# EAGLE board VM_Motor_v2.x (EAGLE 7.0.0)
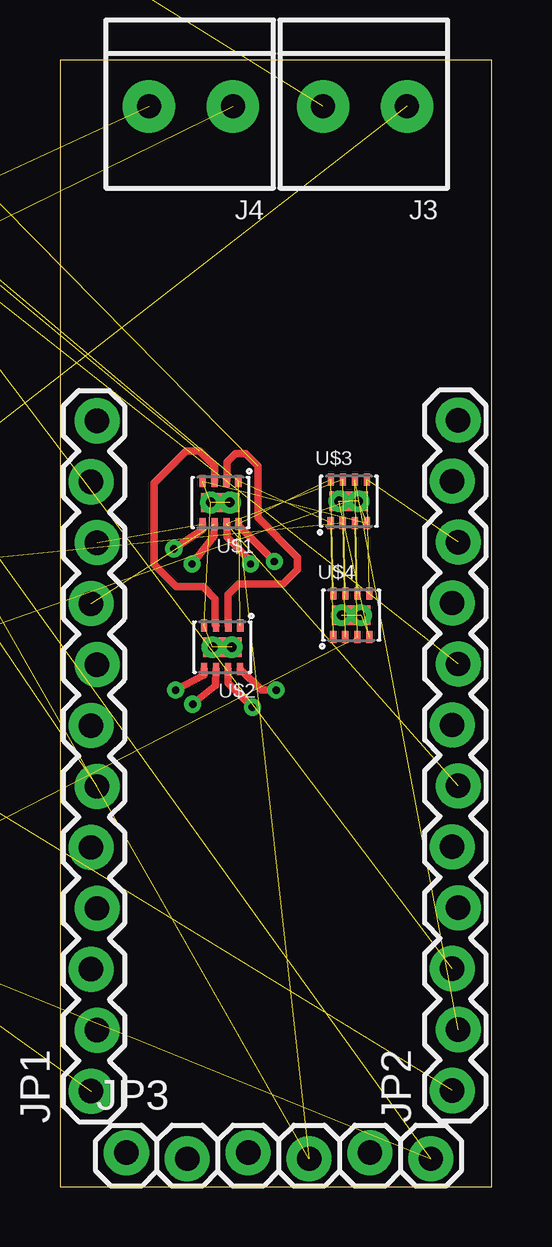
[diagram p0: board, top side]
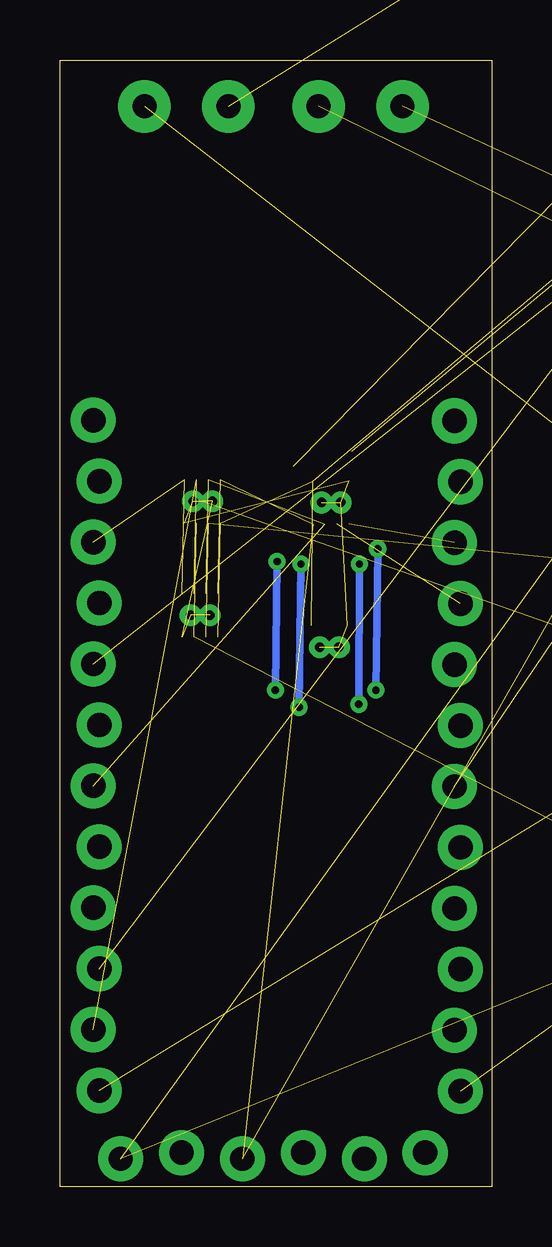
[diagram p1: board, bottom side, seen from below]

Size 18 x 46.97 mm. Coordinates in mm from the lower left corner, seen from the top.
Outline: 0,0 18,0 18,46.97 0,46.97 0,0
Copper layers (1*16): Top 0.035mm / dielectric 1.5mm / Bottom 0.035mm
Design rules "default": minimum track width 10mil, minimum drill 24mil, track to track 8mil, track to pad 8mil, pad to pad 8mil, via to via 8mil, smd to smd 8mil, copper to edge 40mil, drill to drill 8mil, minimum pad ring 10mil, minimum via ring 8mil, stop-mask expansion 4mil, vias tented up to drill 0mil, thermal gap 10mil

## Footprints (pad centres in the part's own frame; a part is rotated, then mirrored left to right if it is on the bottom)
0402-CAP = smd 0.7 x 0.9: 1 -0.65,0; 2 0.65,0
C0402 = smd 0.7 x 0.9: 1 -0.65,0; 2 0.65,0
150CLZ-0810 = smd 3.5 x 2.5: + 3.25,0; - -3.25,0
PTC-1206 = smd 1 x 1.8: 1 -1.4,0; 2 1.4,0
TERMBLOCK_1X2-3.5MM = drill 1 pad 2.184: 1 1.8,0; 2 -1.7,0
1X12_LOCK = drill 1.016 pad 1.88: 1 0,0.127; 2 2.54,-0.127; 3 5.08,0.127; 4 7.62,-0.127; 5 10.16,0.127; 6 12.7,-0.127; 7 15.24,0.127; 8 17.78,-0.127; 9 20.32,0.127; 10 22.86,-0.127; 11 25.4,0.127; 12 27.94,-0.127
1X06_LOCK = drill 1.016 pad 1.88: 1 0,0; 2 2.54,-0.254; 3 5.08,0; 4 7.62,-0.254; 5 10.16,0; 6 12.7,-0.254
1X03_LOCK = drill 1.016 pad 1.88: 1 0,0.127; 2 2.54,-0.127; 3 5.08,0.127
LED-TRICOLOR-5050 = smd 2 x 1.1: 1 -2.4,1.7; 2 -2.4,0; 3 -2.4,-1.7; 4 2.4,-1.7; 5 2.4,0; 6 2.4,1.7
SOT23-3 = smd 0.8 x 0.9: 1 -0.95,-1; 2 0.95,-1; 3 0,1.1
SJ_2S-NO = smd 0.635 x 1.27: 1 -0.45,0; 2 0.45,0
4X0402ARV341 = smd 0.4 x 0.5: 1 -0.8,-0.5; 4 0.8,-0.5; 5 0.8,0.5; 8 -0.8,0.5 | smd 0.3 x 0.5: 2 -0.25,-0.5; 3 0.25,-0.5; 6 0.25,0.5; 7 -0.25,0.5
QFN8 = smd 0.28 x 0.5: P$1 -0.75,-0.9; P$2 -0.25,-0.9 | smd 0.25 x 0.5: P$3 0.25,-0.9; P$4 0.75,-0.9; P$5 0.75,0.9; P$6 0.25,0.9; P$7 -0.25,0.9; P$8 -0.75,0.9 | smd 1.6 x 0.8: P$9 0,0 | drill 0.4 pad 0.6: P$10 0.4,0; P$11 -0.4,0

## Placement (x,y rotation side)
C1  .1uF  [0402-CAP]  -39.37,62.23 0 top  (outside the outline)
C2  .1uF  [0402-CAP]  -43.18,62.23 0 top  (outside the outline)
C3  100nF  [C0402]  -27.94,52.07 0 top  (outside the outline)
C4  100nF  [C0402]  -35.56,52.07 0 top  (outside the outline)
C5  100nF  [C0402]  -43.18,52.07 0 top  (outside the outline)
C6  100nF  [C0402]  -50.8,52.07 0 top  (outside the outline)
C7  1000uF  [150CLZ-0810]  -19.05,16.51 0 top  (outside the outline)
C8  .1uF  [0402-CAP]  -46.99,62.23 0 top  (outside the outline)
C10  10uF  [0402-CAP]  -50.8,62.23 0 top  (outside the outline)
C11  10uF  [0402-CAP]  -54.61,62.23 0 top  (outside the outline)
C12  100nF  [C0402]  -17.78,57.15 0 top  (outside the outline)
C13  10uF  [0402-CAP]  -15.24,67.31 0 top  (outside the outline)
C14  10uF  [0402-CAP]  -19.05,67.31 0 top  (outside the outline)
C15  100nF  [C0402]  -25.4,57.15 0 top  (outside the outline)
C16  10uF  [0402-CAP]  -22.86,67.31 0 top  (outside the outline)
C17  .1uF  [0402-CAP]  -26.67,67.31 0 top  (outside the outline)
C18  100nF  [C0402]  -33.02,57.15 0 top  (outside the outline)
C19  100nF  [C0402]  -40.64,57.15 0 top  (outside the outline)
C20  10uF  [0402-CAP]  -30.48,67.31 0 top  (outside the outline)
F1  PTCSMD  [PTC-1206]  -15.24,62.23 0 top  (outside the outline)
J1  [TERMBLOCK_1X2-3.5MM]  -26.67,3.81 0 top  (outside the outline)
J3  [TERMBLOCK_1X2-3.5MM]  12.78,45.03 180 top
J4  [TERMBLOCK_1X2-3.5MM]  5.51,45.03 180 top
JP1  M12LOCK  [1X12_LOCK]  1.42,3.99 90 top
JP2  M12LOCK  [1X12_LOCK]  16.48,4.01 90 top
JP3  [1X06_LOCK]  2.77,1.42 0 top
JP4  [1X03_LOCK]  -57.15,45.72 0 top  (outside the outline)
JP5  [1X03_LOCK]  -20.32,50.8 0 top  (outside the outline)
LED1  LED-TRICOLOR-5050NO_IC  [LED-TRICOLOR-5050]  -52.07,16.51 0 top  (outside the outline)
LED2  LED-TRICOLOR-5050NO_IC  [LED-TRICOLOR-5050]  -25.4,25.4 0 top  (outside the outline)
Q1  MMBT2222A  [SOT23-3]  -20.32,62.23 0 top  (outside the outline)
Q2  MMBT2222A  [SOT23-3]  -25.4,62.23 0 top  (outside the outline)
RAW->VIN  SOLDERJUMPERNO  [SJ_2S-NO]  -48.26,57.15 0 top  (outside the outline)
RN1  [4X0402ARV341]  -29.21,62.23 0 top  (outside the outline)
RN2  [4X0402ARV341]  -34.29,62.23 0 top  (outside the outline)
U$1  DRV8837  [QFN8]  6.69,28.53 180 top
U$2  DRV8837  [QFN8]  6.77,22.49 180 top
U$3  DRV8837  [QFN8]  12.04,28.58 0 top
U$4  DRV8837  [QFN8]  12.15,23.83 0 top
VIN->5V  SOLDERJUMPERNO  [SJ_2S-NO]  -55.88,57.15 0 top  (outside the outline)

## Library data of the parts
C1 C2 C8 C10 C11 C13 C14 C16 C17 C20 = SparkFun-Capacitors
C3-C7 C12 C15 C18 C19 = resistor
F1 = SparkFun-PowerIC; PROD_ID: RES-11150
J1 J3 J4 = microbuilder
JP1-JP5 = SparkFun-Connectors
LED1 LED2 = SparkFun-LED
Q1 Q2 = SparkFun-DiscreteSemi; PROD_ID: TRANS-08049
RAW->VIN VIN->5V = SparkFun-Retired
RN1 RN2 = resistor-dil; OC_FARNELL: unknown; OC_NEWARK: unknown
U$1-U$4 = bt_motordriver

## Nets
+5V: C1.1 C2.1 C8.1 C17.1 JP3.4 U$1.P$8 U$2.P$8 U$3.P$8 U$4.P$8 VIN->5V.1
CTS_RES: JP3.5
DTR_SEL: JP3.1
GND: C1.2 C2.2 C3.2 C4.2 C5.2 C6.2 C7.- C8.2 C10.2 C11.2 C12.2 C13.2 C14.2 C15.2 C16.2 C17.2 C18.2 C19.2 C20.2 J3.2 JP2.1 JP3.6 JP4.3 JP5.1 Q1.2 Q2.2 RN1.1 RN1.4 RN2.1 RN2.4 U$1.P$4 U$1.P$9 U$1.P$10 U$1.P$11 U$2.P$4 U$2.P$9 U$2.P$10 U$2.P$11 U$3.P$4 U$3.P$9 U$3.P$10 U$3.P$11 U$4.P$4 U$4.P$9 U$4.P$10 U$4.P$11
HM-RX: JP2.12
HM-TX: JP2.11
IO20: JP2.8 RN2.3
IO_02: JP2.9
IO_05-SDA: JP1.11
IO_06: JP1.7
IO_07: JP1.6 RN1.3
IO_08: JP1.5
IO_08-SCL: JP1.12
IO_09: JP1.4
IO_10: JP1.8
IO_010: JP1.3
IO_011: JP1.1 JP4.1
IO_13: JP2.3 JP5.3
IO_14: JP2.4
IO_15: JP2.7
IO_110: JP1.2
IO_111: JP2.5
MOTOR1_DIR: JP1.10 U$1.P$5 U$2.P$5
MOTOR1_PWM: JP1.9 U$1.P$6 U$2.P$6
MOTOR2_DIR: JP2.10 U$3.P$5 U$4.P$5
MOTOR2_PWM: JP2.2 U$3.P$6 U$4.P$6
MOUT1_A: C5.1 C12.1 J4.2 LED1.3 U$1.P$2 U$2.P$2
MOUT1_B: C6.1 C15.1 J4.1 LED1.1 U$1.P$3 U$2.P$3
MOUT2_A: C3.1 C18.1 J1.2 LED2.3 U$3.P$2 U$4.P$2
MOUT2_B: C4.1 C19.1 J1.1 LED2.1 U$3.P$3 U$4.P$3
N$2: Q1.1 RN2.6
N$3: LED1.4 RN1.8
N$4: LED1.6 RN1.5
N$5: LED2.4 RN2.8
N$7: LED1.5 RN1.7
N$8: Q1.3 RN2.2
N$9: Q2.3 RN1.2
N$10: Q2.1 RN1.6
N$11: LED2.6 RN2.5
N$12: LED2.5 RN2.7
N$13: F1.1 J3.1
RAW: C7.+ F1.2 RAW->VIN.1
RX: JP3.3
SLEEP: JP2.6 U$1.P$7 U$2.P$7 U$3.P$7 U$4.P$7
TX: JP3.2
VIN: C10.1 C11.1 C13.1 C14.1 C16.1 JP4.2 JP5.2 LED1.2 LED2.2 RAW->VIN.2 U$1.P$1 U$2.P$1 U$3.P$1 U$4.P$1 VIN->5V.2

## Tracks (layer width: path | path; a pad name or v marks a point on that pad's centre or on a via)
+5V  (via drill 0.3)  (8 unrouted)
  Top 0.305: U$1.P$8 7.44,27.56 v8.94,26.06 | v9.02,20.7 8.41,20.7 U$2.P$8
  Bottom 0.305: v8.94,26.06 v9.02,20.7
GND  (45 unrouted)
IO20  (1 unrouted)
IO_07  (1 unrouted)
IO_011  (1 unrouted)
IO_13  (1 unrouted)
MOTOR1_DIR  (via drill 0.3)  (1 unrouted)
  Top 0.305: U$2.P$5 6.02,21.34 v4.83,20.7 | v4.75,26.59 5.94,27.4 U$1.P$5
  Bottom 0.305: v4.83,20.7 v4.75,26.59
MOTOR1_PWM  (via drill 0.3)  (1 unrouted)
  Top 0.305: U$2.P$6 6.5,20.9 v5.54,20.12 | v5.51,25.96 6.43,27.12 U$1.P$6
  Bottom 0.305: v5.54,20.12 v5.51,25.96
MOTOR2_DIR  (2 unrouted)
MOTOR2_PWM  (2 unrouted)
MOUT1_A  (4 unrouted)
  Top 0.305: U$2.P$2 7.02,24.7 7.44,25.12 9.3,25.12 9.91,25.73 9.91,26.24 8.26,27.89 8.26,30.05 7.75,30.56 7.32,30.56 6.96,30.2 6.96,29.45 U$1.P$2
MOUT1_B  (4 unrouted)
  Top 0.305: U$1.P$3 6.44,30.03 5.82,30.66 5.26,30.66 3.94,29.34 3.94,25.93 4.85,25.02 5.97,25.02 6.48,24.51 6.48,23.44 U$2.P$3
MOUT2_A  (5 unrouted)
MOUT2_B  (5 unrouted)
N$2  (1 unrouted)
N$3  (1 unrouted)
N$4  (1 unrouted)
N$5  (1 unrouted)
N$7  (1 unrouted)
N$8  (1 unrouted)
N$9  (1 unrouted)
N$10  (1 unrouted)
N$11  (1 unrouted)
N$12  (1 unrouted)
N$13  (1 unrouted)
RAW  (2 unrouted)
SLEEP  (via drill 0.3)  (3 unrouted)
  Top 0.305: U$2.P$7 7.02,21 v8.03,19.99 | v7.95,25.96 7.95,26.09 6.96,27.08 6.96,27.61 U$1.P$7
  Bottom 0.305: v8.03,19.99 v7.95,25.96
VIN  (14 unrouted)